# Altium PCB PSC_LED_KEYBOARD.PcbDoc (part 1 of 2)
Units mm, origin at the board's own origin, x right, y up, seen from the top; angles counter-clockwise.
Board outline 100 x 100 mm, 2 copper layers (Top Layer, Bottom Layer); 100 components, 28 nets, 284 pads, 1428 vias.
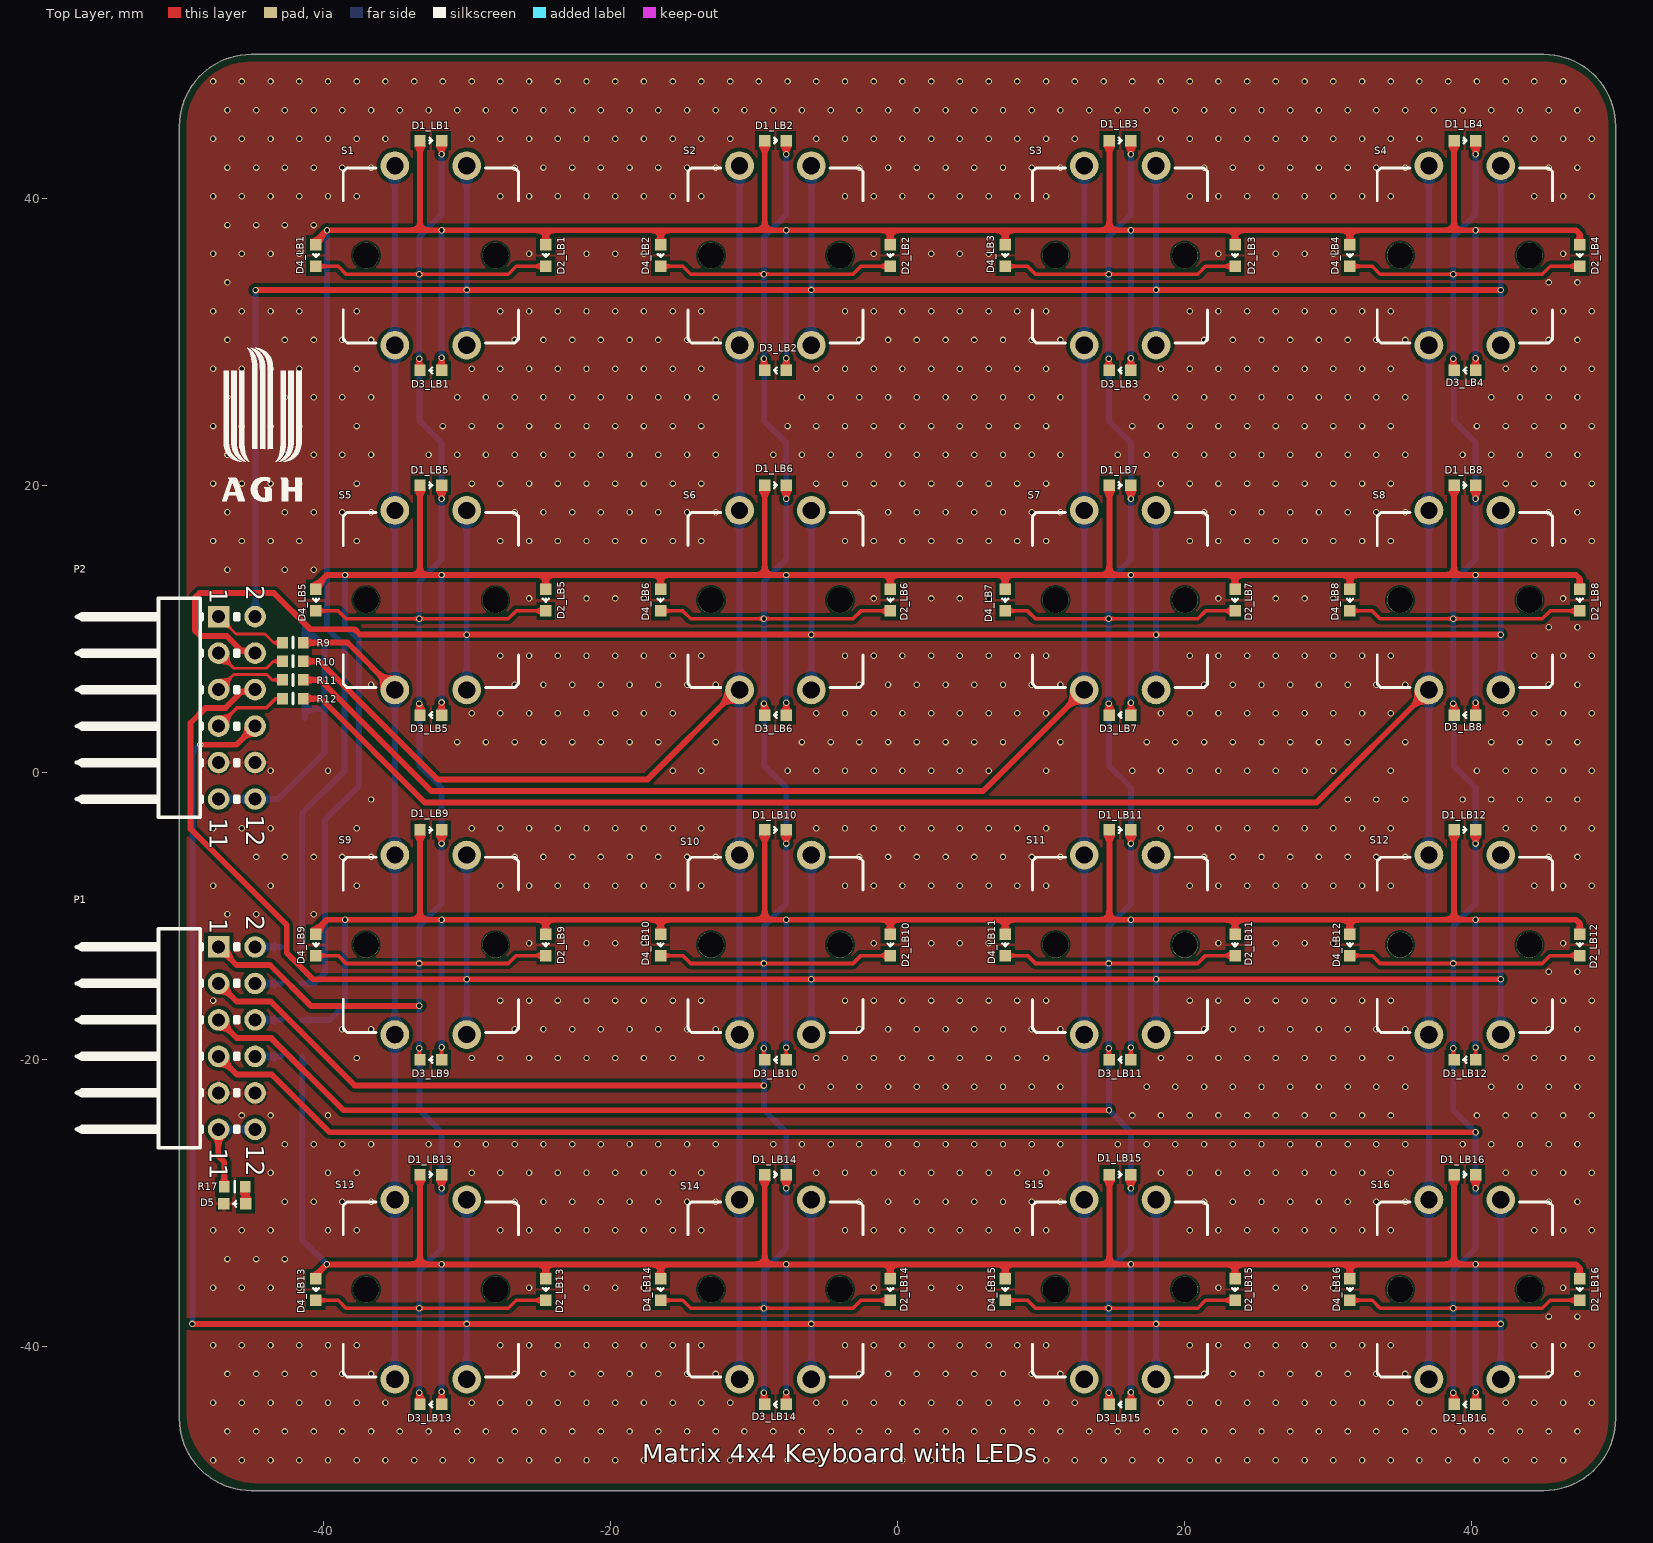
[diagram p0: Top Layer view]
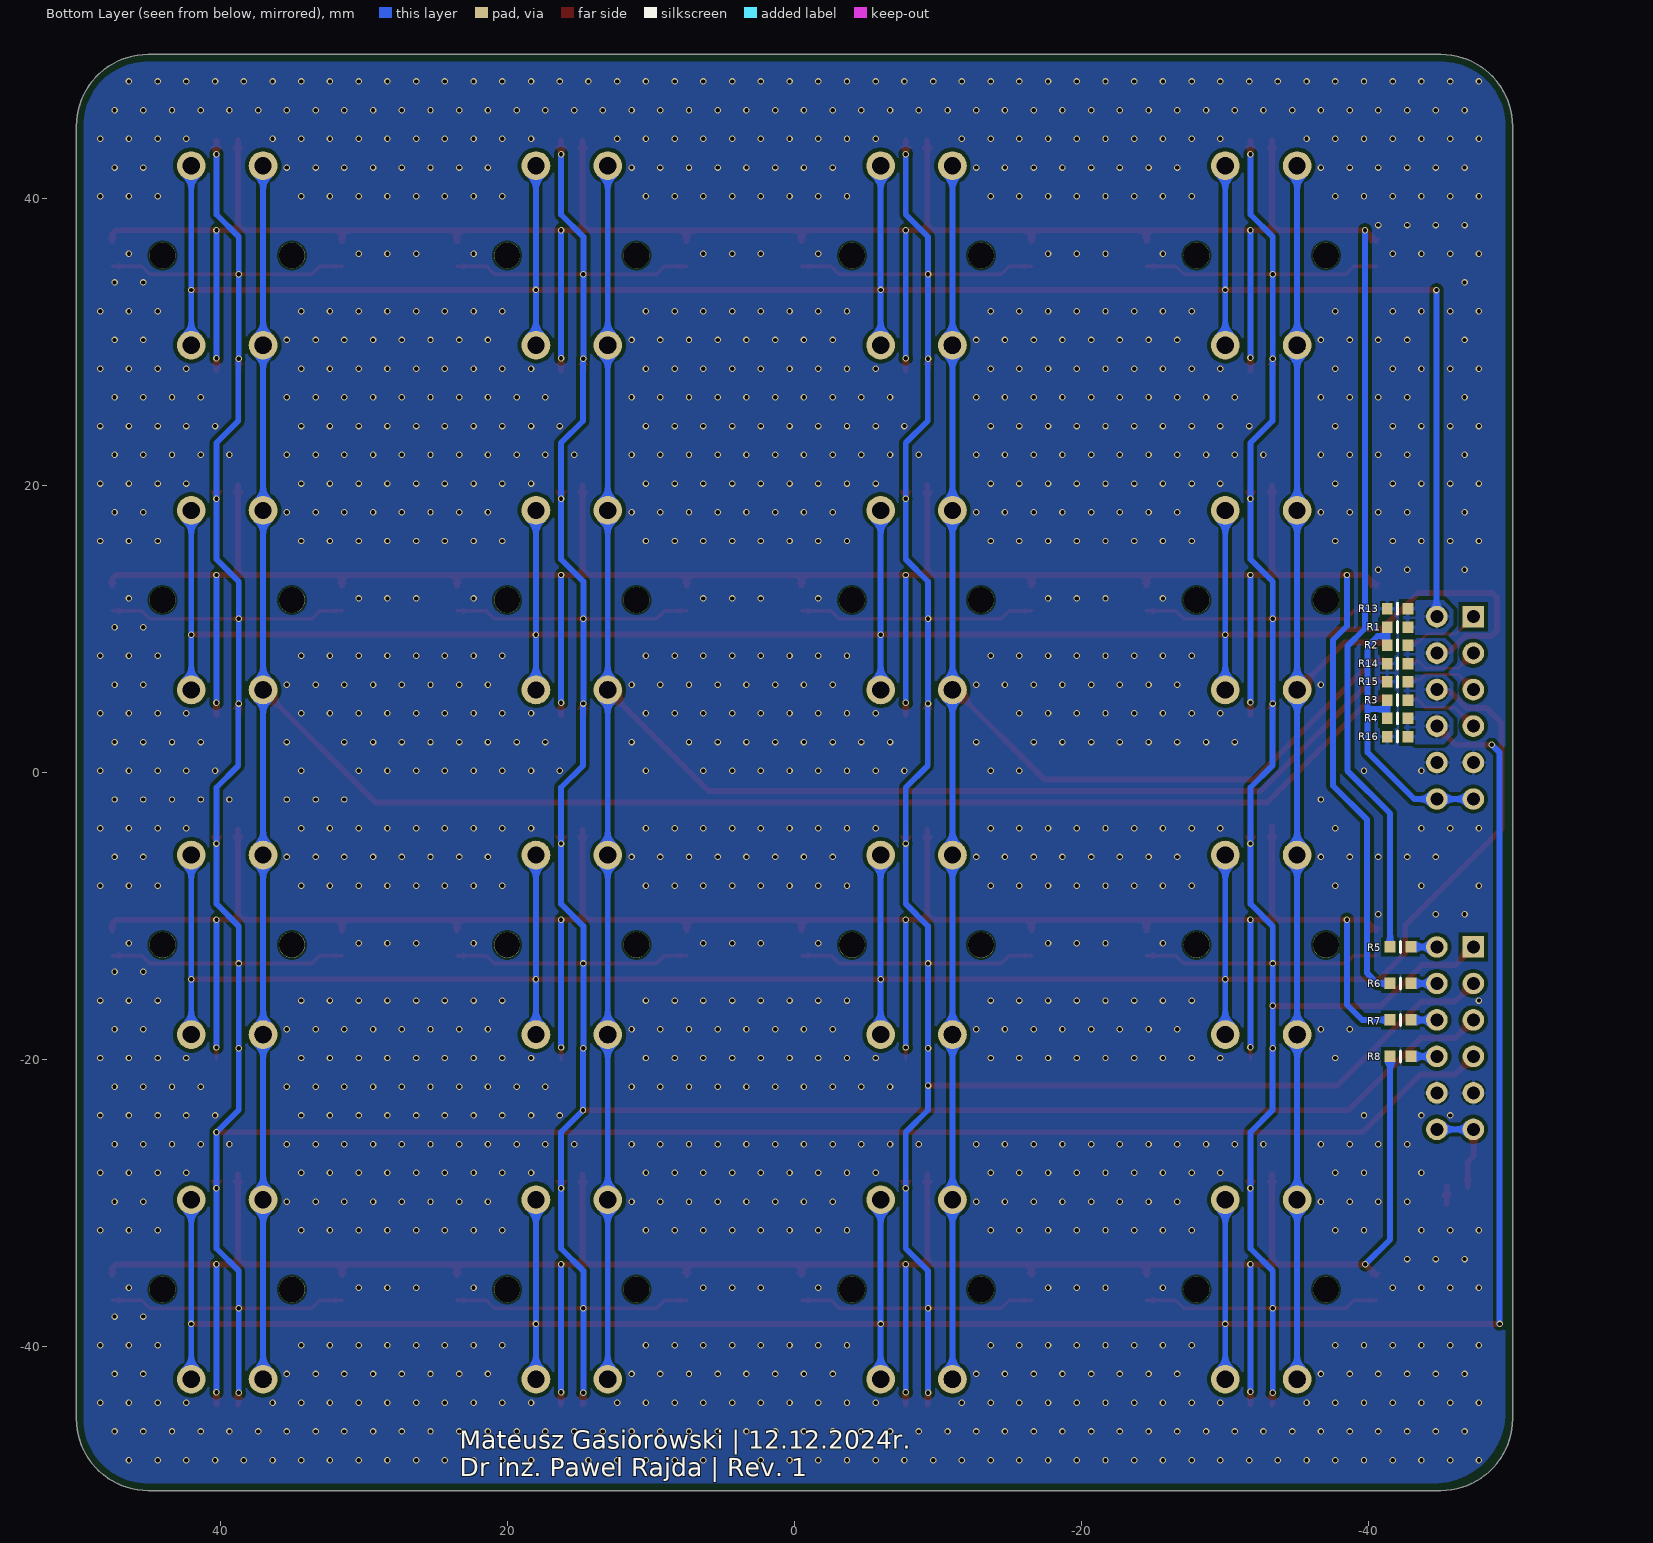
[diagram p1: Bottom Layer view, seen from below]
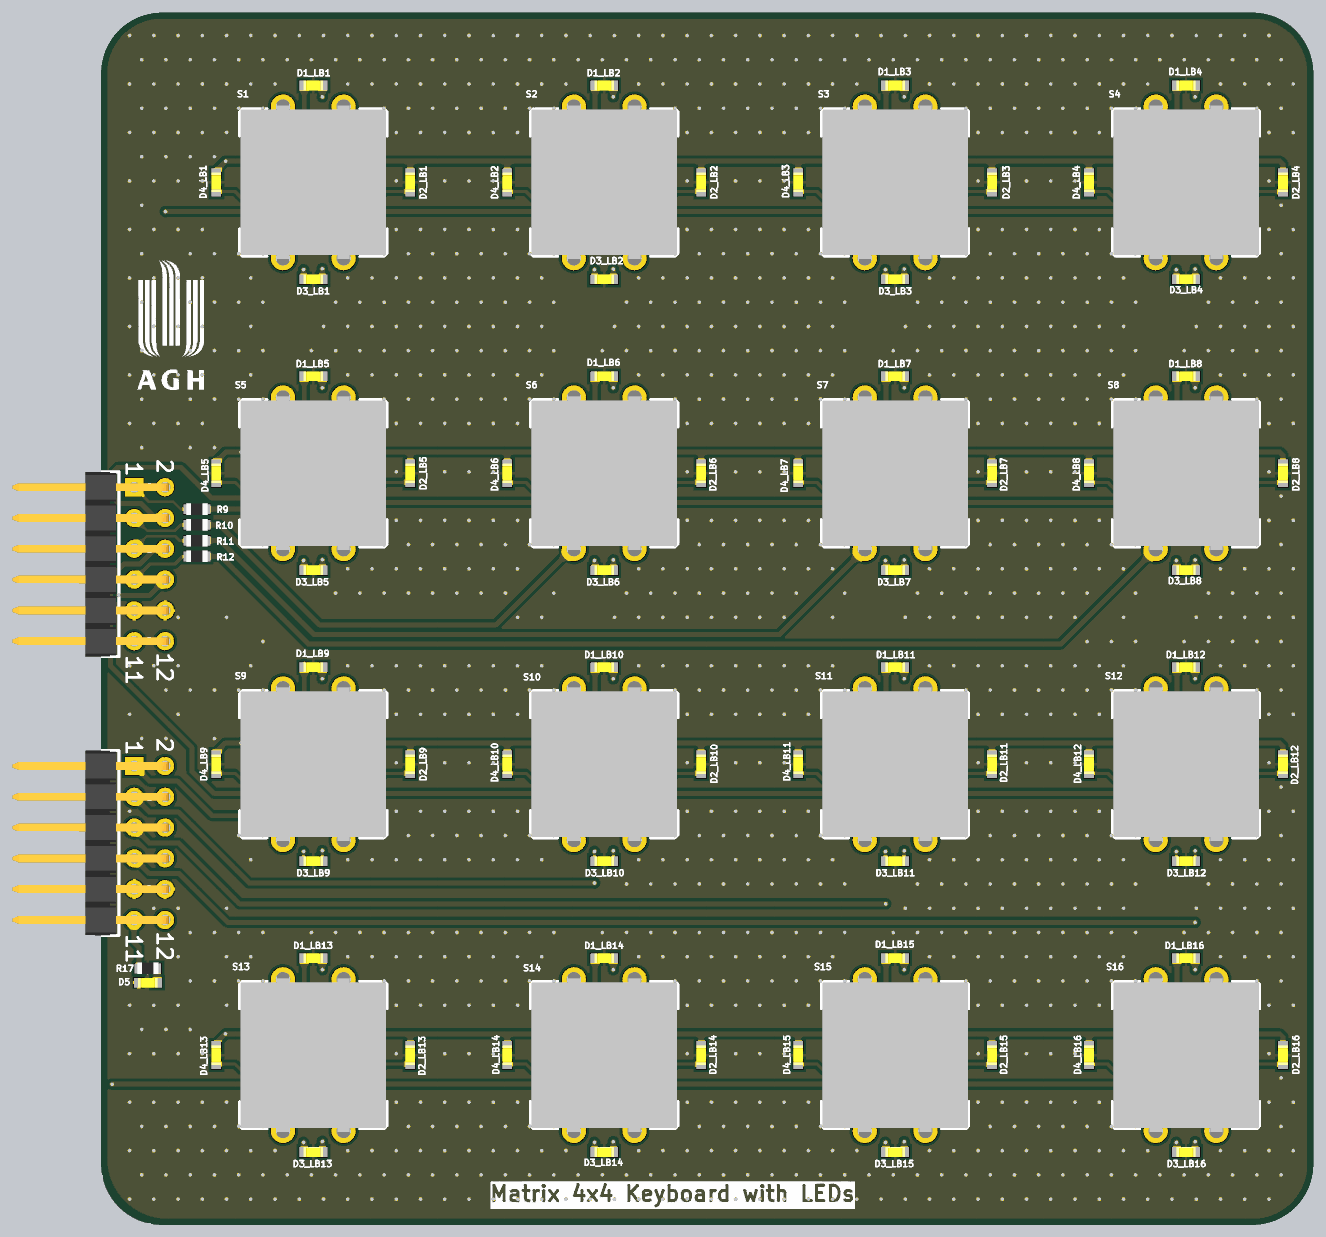
[diagram p3: 3D render of the assembled board from above, using the file's embedded part models]
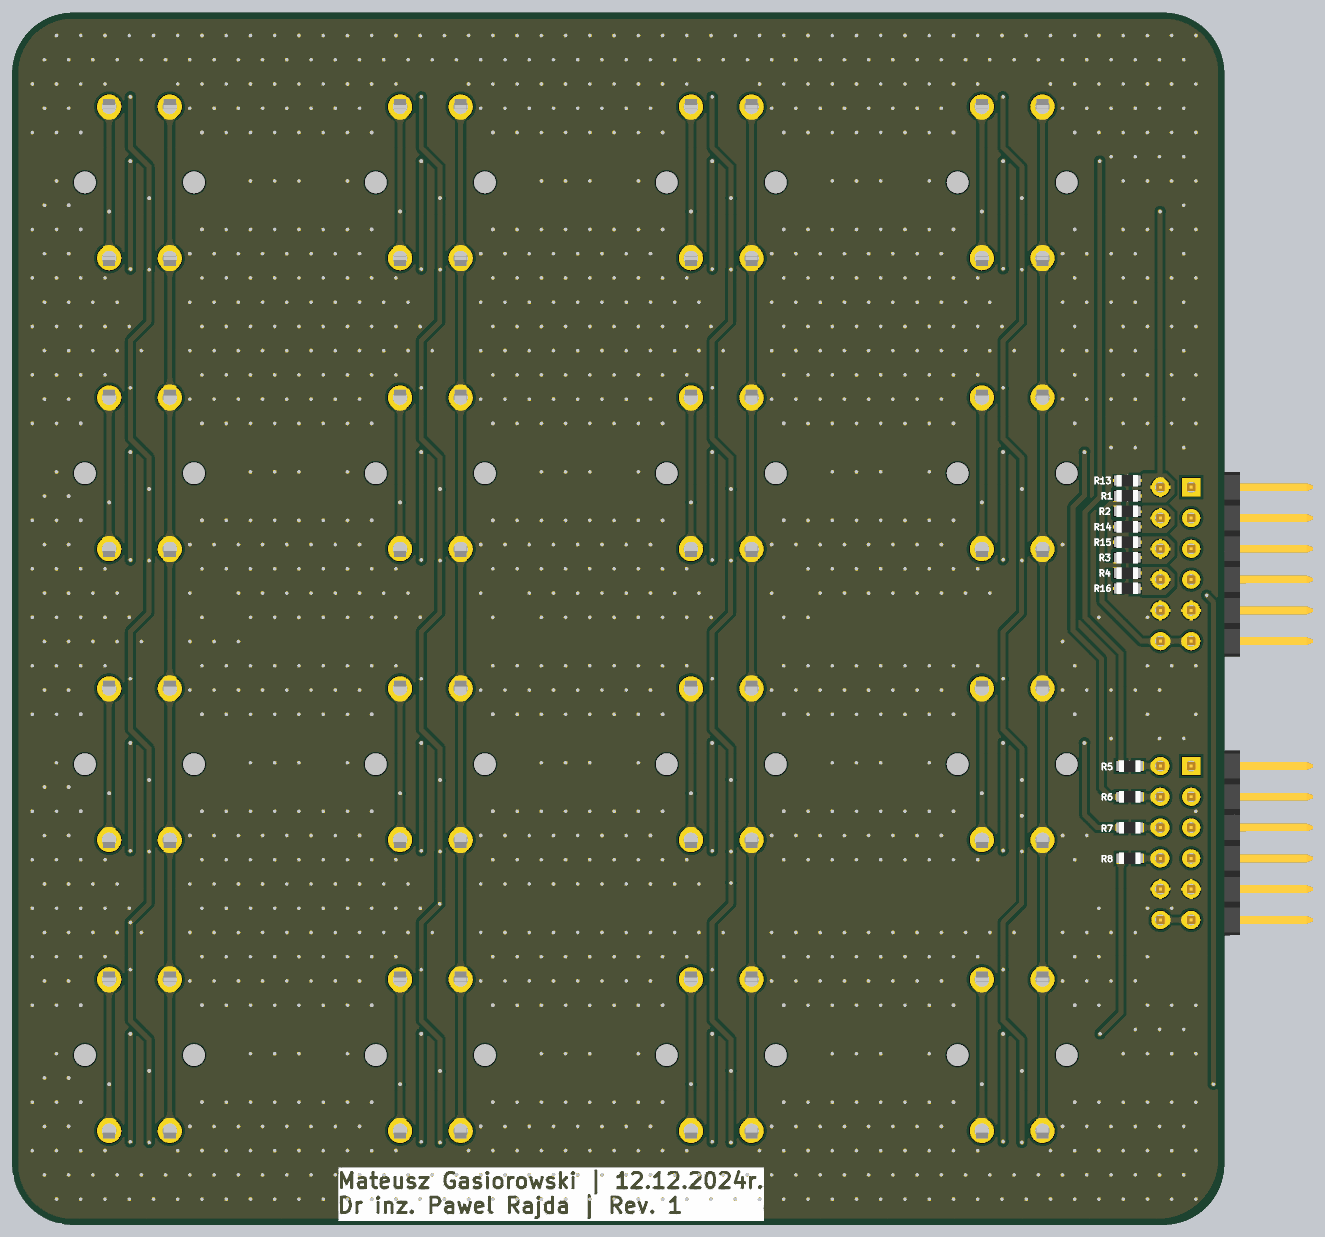
[diagram p4: 3D render of the assembled board from below, using the file's embedded part models]

## Layer stack, top to bottom
Top Solder: solder mask 0.0102, Solder Resist, Dk 3.5
Top Layer: signal copper 0.0356
Dielectric 1: dielectric 0.32, FR-4, Dk 4.8
Bottom Layer: signal copper 0.0356
Bottom Solder: solder mask 0.0102, Solder Resist, Dk 3.5

## Board outline
-50,-45 -50,45 cw(c-45,45) -45,50 45,50 cw(c45,45) 50,45 50,-45 cw(c45,-45) 45,-50 -45,-50 cw(c-45,-45)

## Design rules (kind name [scope] priority, off if disabled: settings)
BoardOutlineClearance [All] p1: gap=0.2 ignorepadtopadclearanceinfootprint=FALSE
Clearance [All] p1: gap=0.127 ignorepadtopadclearanceinfootprint=FALSE except(0.2: Track-SMDPad Track-THPad; 0.254: Arc-Poly Track-Poly Track-Hole SMDPad-Poly THPad-Poly Via-Via Via-Poly Fill-Poly Poly-Poly; 0.54: THPad-THPad)
ComponentClearance [All] p1: gap=0.102 collisioncheckmode=3 verticalgap=0.102 showdistances=TRUE
DiffPairsRouting [All] p1: maxlimit=0.102 minlimit=0.102 mostfreqgap=0.102 toplayer_minwidth=0.102 toplayer_maxwidth=1816.048 toplayer_prefwidth=0.102 bottomlayer_minwidth=0.102 bottomlayer_maxwidth=1816.048 bottomlayer_prefwidth=0.102 maxuncoupledlength=12.7
Height [All] p1: minheight=0 maxheight=1816.048 prefheight=12.7
HoleSize [All] p1: absolutevalues=TRUE maxlimit=6.3 minlimit=0.2 maxpercent=80.000 minpercent=20.000
HoleToHoleClearance [All] p1: gap=0.254 allowstackedmicrovias=FALSE
MinimumAnnularRing MinimumAnnularRing_VIA [IsVia] p1: minimumring=0.075
MinimumAnnularRing [All] p2: minimumring=0.13
MinimumSolderMaskSliver [All] p1: minsoldermaskwidth=0
PlaneClearance [All] p1: clearance=0.305
PlaneConnect [All] p1: pad.planeconnectstyle=Relief pad.reliefexpansion=0.3 pad.reliefentries=4 pad.reliefconductorwidth=0.381 pad.reliefairgap=0.102 via.planeconnectstyle=Direct via.reliefexpansion=0.3 via.reliefentries=4 via.reliefconductorwidth=0.127 via.reliefairgap=0.127
PolygonConnect [All] p1: thpad.connectstyle=Relief thpad.reliefconductorwidth=0.254 thpad.reliefentries=4 thpad.polygonreliefangle="90 Angle" thpad.airgapwidth=0.127 smdpad.connectstyle=Relief smdpad.reliefconductorwidth=0.254 smdpad.reliefentries=4 smdpad.polygonreliefangle="90 Angle" smdpad.airgapwidth=0.127 via.connectstyle=Direct via.reliefconductorwidth=0.254 via.reliefentries=4 via.polygonreliefangle="90 Angle" via.airgapwidth=0.254
RoutingVias [All] p1: holewidth=0.2 width=0.45 viastyle="Through Hole" minholewidth=0.2 minwidth=0.45 maxholewidth=6.3 maxwidth=6.55
SilkToSilkClearance [All] p1: silktosilkclearance=0.025
SilkToSolderMaskClearance [IsPad] p1: minsilkscreentomaskgap=0.051 clearancetoexposedcopper=TRUE
SolderMaskExpansion SolderMaskExpansion_VIA [IsVia] p1: expansion=-0.508 istentingtop=TRUE
SolderMaskExpansion [All] p2: expansion=0.075 istentingtop=FALSE
SupplyNets "Schematic Supply Nets_1" [InNet('GND')] p1: voltage=0.000
SupplyNets "Schematic Supply Nets" [InNet('3V3')] p2: voltage=0.000
UnRoutedNet [All] p1: checkbadconnections=TRUE
UnpouredPolygon UnpouredPolygon_1 [All] p1:
Width [All] p1: maxlimit=5.08 minlimit=0.127 preferedwidth=0.152
18 further rules are at their usual default settings.

## Classes and differential pairs
component class LB16: D1_LB16 D2_LB16 D3_LB16 D4_LB16
component class LB15: D1_LB15 D2_LB15 D3_LB15 D4_LB15
component class LB14: D1_LB14 D2_LB14 D3_LB14 D4_LB14
component class LB13: D1_LB13 D2_LB13 D3_LB13 D4_LB13
component class LB12: D1_LB12 D2_LB12 D3_LB12 D4_LB12
component class LB11: D1_LB11 D2_LB11 D3_LB11 D4_LB11
component class LB10: D1_LB10 D2_LB10 D3_LB10 D4_LB10
component class LB9: D1_LB9 D2_LB9 D3_LB9 D4_LB9
component class LB8: D1_LB8 D2_LB8 D3_LB8 D4_LB8
component class LB7: D1_LB7 D2_LB7 D3_LB7 D4_LB7
component class LB6: D1_LB6 D2_LB6 D3_LB6 D4_LB6
component class LB5: D1_LB5 D2_LB5 D3_LB5 D4_LB5
component class LB4: D1_LB4 D2_LB4 D3_LB4 D4_LB4
component class LB3: D1_LB3 D2_LB3 D3_LB3 D4_LB3
channel class Led_block: LB1 LB2 LB3 LB4 LB5 LB6 LB7 LB8 LB9 LB10 LB11 LB12 LB13 LB14 LB15 LB16
component class PSC_LED_KEYBOARD: D5 P1 P2 R1 R2 R3 R4 R5 R6 R7 R8 R9 R10 R11 R12 R13 R14 R15 R16 R17 S1 S2 S3 S4 S5 S6 S7 S8 S9 S10 S11 S12 S13 S14 S15 S16
component class LB2: D1_LB2 D2_LB2 D3_LB2 D4_LB2
component class LB1: D1_LB1 D2_LB1 D3_LB1 D4_LB1

## Components (designator, comment, footprint, x,y, rotation, side; value= is the part's Value field where it differs from the comment)
D1_LB1 "Red LED 0603" OL_0603_1608 -32.5,44 r180 top value=LTST-C193KRKT-5A (schematic designator D1)
D1_LB2 "Red LED 0603" OL_0603_1608 -8.5,44 r180 top value=LTST-C193KRKT-5A (schematic designator D1)
D1_LB3 "Red LED 0603" OL_0603_1608 15.5,44 r180 top value=LTST-C193KRKT-5A (schematic designator D1)
D1_LB4 "Red LED 0603" OL_0603_1608 39.5,44 r180 top value=LTST-C193KRKT-5A (schematic designator D1)
D1_LB5 "Red LED 0603" OL_0603_1608 -32.5,20 r180 top value=LTST-C193KRKT-5A (schematic designator D1)
D1_LB6 "Red LED 0603" OL_0603_1608 -8.5,20 r180 top value=LTST-C193KRKT-5A (schematic designator D1)
D1_LB7 "Red LED 0603" OL_0603_1608 15.5,20 r180 top value=LTST-C193KRKT-5A (schematic designator D1)
D1_LB8 "Red LED 0603" OL_0603_1608 39.5,20 r180 top value=LTST-C193KRKT-5A (schematic designator D1)
D1_LB9 "Red LED 0603" OL_0603_1608 -32.5,-4 r180 top value=LTST-C193KRKT-5A (schematic designator D1)
D1_LB10 "Red LED 0603" OL_0603_1608 -8.5,-4 r180 top value=LTST-C193KRKT-5A (schematic designator D1)
D1_LB11 "Red LED 0603" OL_0603_1608 15.5,-4 r180 top value=LTST-C193KRKT-5A (schematic designator D1)
D1_LB12 "Red LED 0603" OL_0603_1608 39.5,-4 r180 top value=LTST-C193KRKT-5A (schematic designator D1)
D1_LB13 "Red LED 0603" OL_0603_1608 -32.5,-28 r180 top value=LTST-C193KRKT-5A (schematic designator D1)
D1_LB14 "Red LED 0603" OL_0603_1608 -8.5,-28 r180 top value=LTST-C193KRKT-5A (schematic designator D1)
D1_LB15 "Red LED 0603" OL_0603_1608 15.5,-28 r180 top value=LTST-C193KRKT-5A (schematic designator D1)
D1_LB16 "Red LED 0603" OL_0603_1608 39.5,-28 r180 top value=LTST-C193KRKT-5A (schematic designator D1)
D2_LB1 "Red LED 0603" OL_0603_1608 -24.5,36 r90 top value=LTST-C193KRKT-5A (schematic designator D2)
D2_LB2 "Red LED 0603" OL_0603_1608 -0.5,36 r90 top value=LTST-C193KRKT-5A (schematic designator D2)
D2_LB3 "Red LED 0603" OL_0603_1608 23.5,36 r90 top value=LTST-C193KRKT-5A (schematic designator D2)
D2_LB4 "Red LED 0603" OL_0603_1608 47.5,36 r90 top value=LTST-C193KRKT-5A (schematic designator D2)
D2_LB5 "Red LED 0603" OL_0603_1608 -24.5,12 r90 top value=LTST-C193KRKT-5A (schematic designator D2)
D2_LB6 "Red LED 0603" OL_0603_1608 -0.5,12 r90 top value=LTST-C193KRKT-5A (schematic designator D2)
D2_LB7 "Red LED 0603" OL_0603_1608 23.5,12 r90 top value=LTST-C193KRKT-5A (schematic designator D2)
D2_LB8 "Red LED 0603" OL_0603_1608 47.5,12 r90 top value=LTST-C193KRKT-5A (schematic designator D2)
D2_LB9 "Red LED 0603" OL_0603_1608 -24.5,-12 r90 top value=LTST-C193KRKT-5A (schematic designator D2)
D2_LB10 "Red LED 0603" OL_0603_1608 -0.5,-12 r90 top value=LTST-C193KRKT-5A (schematic designator D2)
D2_LB11 "Red LED 0603" OL_0603_1608 23.5,-12 r90 top value=LTST-C193KRKT-5A (schematic designator D2)
D2_LB12 "Red LED 0603" OL_0603_1608 47.5,-12 r90 top value=LTST-C193KRKT-5A (schematic designator D2)
D2_LB13 "Red LED 0603" OL_0603_1608 -24.5,-36 r90 top value=LTST-C193KRKT-5A (schematic designator D2)
D2_LB14 "Red LED 0603" OL_0603_1608 -0.5,-36 r90 top value=LTST-C193KRKT-5A (schematic designator D2)
D2_LB15 "Red LED 0603" OL_0603_1608 23.5,-36 r90 top value=LTST-C193KRKT-5A (schematic designator D2)
D2_LB16 "Red LED 0603" OL_0603_1608 47.5,-36 r90 top value=LTST-C193KRKT-5A (schematic designator D2)
D3_LB1 "Red LED 0603" OL_0603_1608 -32.5,28 r0 top value=LTST-C193KRKT-5A (schematic designator D3)
D3_LB2 "Red LED 0603" OL_0603_1608 -8.5,28 r0 top value=LTST-C193KRKT-5A (schematic designator D3)
D3_LB3 "Red LED 0603" OL_0603_1608 15.5,28 r0 top value=LTST-C193KRKT-5A (schematic designator D3)
D3_LB4 "Red LED 0603" OL_0603_1608 39.5,28 r0 top value=LTST-C193KRKT-5A (schematic designator D3)
D3_LB5 "Red LED 0603" OL_0603_1608 -32.5,4 r0 top value=LTST-C193KRKT-5A (schematic designator D3)
D3_LB6 "Red LED 0603" OL_0603_1608 -8.5,4 r0 top value=LTST-C193KRKT-5A (schematic designator D3)
D3_LB7 "Red LED 0603" OL_0603_1608 15.5,4 r0 top value=LTST-C193KRKT-5A (schematic designator D3)
D3_LB8 "Red LED 0603" OL_0603_1608 39.5,4 r0 top value=LTST-C193KRKT-5A (schematic designator D3)
D3_LB9 "Red LED 0603" OL_0603_1608 -32.5,-20 r0 top value=LTST-C193KRKT-5A (schematic designator D3)
D3_LB10 "Red LED 0603" OL_0603_1608 -8.5,-20 r0 top value=LTST-C193KRKT-5A (schematic designator D3)
D3_LB11 "Red LED 0603" OL_0603_1608 15.5,-20 r0 top value=LTST-C193KRKT-5A (schematic designator D3)
D3_LB12 "Red LED 0603" OL_0603_1608 39.5,-20 r0 top value=LTST-C193KRKT-5A (schematic designator D3)
D3_LB13 "Red LED 0603" OL_0603_1608 -32.5,-44 r0 top value=LTST-C193KRKT-5A (schematic designator D3)
D3_LB14 "Red LED 0603" OL_0603_1608 -8.5,-44 r0 top value=LTST-C193KRKT-5A (schematic designator D3)
D3_LB15 "Red LED 0603" OL_0603_1608 15.5,-44 r0 top value=LTST-C193KRKT-5A (schematic designator D3)
D3_LB16 "Red LED 0603" OL_0603_1608 39.5,-44 r0 top value=LTST-C193KRKT-5A (schematic designator D3)
D4_LB1 "Red LED 0603" OL_0603_1608 -40.5,36 r90 top value=LTST-C193KRKT-5A (schematic designator D4)
D4_LB2 "Red LED 0603" OL_0603_1608 -16.5,36 r90 top value=LTST-C193KRKT-5A (schematic designator D4)
D4_LB3 "Red LED 0603" OL_0603_1608 7.5,36 r90 top value=LTST-C193KRKT-5A (schematic designator D4)
D4_LB4 "Red LED 0603" OL_0603_1608 31.5,36 r90 top value=LTST-C193KRKT-5A (schematic designator D4)
D4_LB5 "Red LED 0603" OL_0603_1608 -40.5,12 r90 top value=LTST-C193KRKT-5A (schematic designator D4)
D4_LB6 "Red LED 0603" OL_0603_1608 -16.5,12 r90 top value=LTST-C193KRKT-5A (schematic designator D4)
D4_LB7 "Red LED 0603" OL_0603_1608 7.5,12 r90 top value=LTST-C193KRKT-5A (schematic designator D4)
D4_LB8 "Red LED 0603" OL_0603_1608 31.5,12 r90 top value=LTST-C193KRKT-5A (schematic designator D4)
D4_LB9 "Red LED 0603" OL_0603_1608 -40.5,-12 r90 top value=LTST-C193KRKT-5A (schematic designator D4)
D4_LB10 "Red LED 0603" OL_0603_1608 -16.5,-12 r90 top value=LTST-C193KRKT-5A (schematic designator D4)
D4_LB11 "Red LED 0603" OL_0603_1608 7.5,-12 r90 top value=LTST-C193KRKT-5A (schematic designator D4)
D4_LB12 "Red LED 0603" OL_0603_1608 31.5,-12 r90 top value=LTST-C193KRKT-5A (schematic designator D4)
D4_LB13 "Red LED 0603" OL_0603_1608 -40.5,-36 r90 top value=LTST-C193KRKT-5A (schematic designator D4)
D4_LB14 "Red LED 0603" OL_0603_1608 -16.5,-36 r90 top value=LTST-C193KRKT-5A (schematic designator D4)
D4_LB15 "Red LED 0603" OL_0603_1608 7.5,-36 r90 top value=LTST-C193KRKT-5A (schematic designator D4)
D4_LB16 "Red LED 0603" OL_0603_1608 31.5,-36 r90 top value=LTST-C193KRKT-5A (schematic designator D4)
D5 "Red LED 0603" OL_0603_1608 -46.15,-30.025 r0 top value=LTST-C193KRKT-5A
P1 "Goldpin male" P_HEADER_2x6_2.54_RIGHT_ANGLE -46,-18.5 r270 top value=90122-0766
P2 "Goldpin male" P_HEADER_2x6_2.54_RIGHT_ANGLE -46,4.5 r270 top value=90122-0766
R1 "Resistor" R_0603_1608 -42,10.129 r0 bottom value=10k
R2 "Resistor" R_0603_1608 -42,8.857 r0 bottom value=10k
R3 "Resistor" R_0603_1608 -42,5.043 r0 bottom value=10k
R4 "Resistor" R_0603_1608 -42,3.771 r0 bottom value=10k
R5 "Resistor" R_0603_1608 -42.2,-12.15 r0 bottom value=10k
R6 "Resistor" R_0603_1608 -42.2,-14.69 r0 bottom value=10k
R7 "Resistor" R_0603_1608 -42.2,-17.23 r0 bottom value=10k
R8 "Resistor" R_0603_1608 -42.2,-19.77 r0 bottom value=10k
R9 "Resistor" R_0603_1608 -42.1,9.043 r0 top value=10k
R10 "Resistor" R_0603_1608 -42.1,7.743 r0 top value=10k
R11 "Resistor" R_0603_1608 -42.1,6.443 r0 top value=10k
R12 "Resistor" R_0603_1608 -42.1,5.143 r0 top value=10k
R13 "Resistor" R_0603_1608 -42,11.4 r180 bottom value=10k
R14 "Resistor" R_0603_1608 -42,7.586 r180 bottom value=10k
R15 "Resistor" R_0603_1608 -42,6.314 r180 bottom value=10k
R16 "Resistor" R_0603_1608 -42,2.5 r180 bottom value=10k
R17 "Resistor" R_0603_1608 -46.15,-28.85 r180 top value=10k
S1 "S_TACTSWITCH" S_TactSwitch_12x12 -32.5,36 r90 top
S2 "S_TACTSWITCH" S_TactSwitch_12x12 -8.5,36 r90 top
S3 "S_TACTSWITCH" S_TactSwitch_12x12 15.5,36 r90 top
S4 "S_TACTSWITCH" S_TactSwitch_12x12 39.5,36 r90 top
S5 "S_TACTSWITCH" S_TactSwitch_12x12 -32.5,12 r90 top
S6 "S_TACTSWITCH" S_TactSwitch_12x12 -8.5,12 r90 top
S7 "S_TACTSWITCH" S_TactSwitch_12x12 15.5,12 r90 top
S8 "S_TACTSWITCH" S_TactSwitch_12x12 39.5,12 r90 top
S9 "S_TACTSWITCH" S_TactSwitch_12x12 -32.5,-12 r90 top
S10 "S_TACTSWITCH" S_TactSwitch_12x12 -8.5,-12 r90 top
S11 "S_TACTSWITCH" S_TactSwitch_12x12 15.5,-12 r90 top
S12 "S_TACTSWITCH" S_TactSwitch_12x12 39.5,-12 r90 top
S13 "S_TACTSWITCH" S_TactSwitch_12x12 -32.5,-36 r90 top
S14 "S_TACTSWITCH" S_TactSwitch_12x12 -8.5,-36 r90 top
S15 "S_TACTSWITCH" S_TactSwitch_12x12 15.5,-36 r90 top
S16 "S_TACTSWITCH" S_TactSwitch_12x12 39.5,-36 r90 top

## Footprints (in the part's own frame and the unit in brackets; to place one, negate y for a bottom-side part, rotate by r counter-clockwise, add the part's x,y. Pads: shape width x height; smd on the part's side, far side on the other; paste and mask are expansions set on the pad)
OL_0603_1608 [mm]
  rect 0.8x0.8 smd: 1(-0.75,0) 2(0.75,0)
  silkscreen extent -0.11,-0.21 0.1,0.21, body extent -0.8,-0.4 0.8,0.4, height 0.75
P_HEADER_2x6_2.54_RIGHT_ANGLE [mm] "Connector; Header"
  rect 1.5x1.5 hole 0.9: 1(-6.35,-1.27)
  round 1.5 hole 0.9: 2(-6.35,1.27) 3(-3.81,-1.27) 4(-3.81,1.27) 5(-1.27,-1.27) 6(-1.27,1.27) 7(1.27,-1.27) 8(1.27,1.27) 9(3.81,-1.27) 10(3.81,1.27) 11(6.35,-1.27) 12(6.35,1.27)
  silkscreen extent -7.62,-11.18 7.62,0.13, body extent -7.62,-11.3 7.62,1.6, height 5.1
R_0603_1608 [mm]
  rect 0.75x0.8 smd: 1(-0.725,0) 2(0.725,0)
  silkscreen extent 0,-0.38 0,0.38, body extent -0.87,-0.47 0.88,0.48, height 0.54
S_TactSwitch_12x12 [mm] "B3F-4050"
  round 2 hole 1.2: 1(-6.25,-2.5) 1(6.25,-2.5) 2(-6.25,2.5) 2(6.25,2.5)
  round 1.8 hole 1.8 unplated: DNC(0,4.5) DNC(0,-4.5)
  silkscreen extent -6.1,-6.1 6.1,6.1, body extent -6.9,-6 6.9,6, height 3

## Part data
D1_LB1 D1_LB2 D1_LB3 D1_LB4 D1_LB5 D1_LB6 D1_LB7 D1_LB8 D1_LB9 D1_LB10 D1_LB11 D1_LB12 D1_LB13 D1_LB14 D1_LB15 D1_LB16 D2_LB1 D2_LB2 D2_LB3 D2_LB4 D2_LB5 D2_LB6 D2_LB7 D2_LB8 D2_LB9 D2_LB10 D2_LB11 D2_LB12 D2_LB13 D2_LB14 D2_LB15 D2_LB16 D3_LB1 D3_LB2 D3_LB3 D3_LB4 D3_LB5 D3_LB6 D3_LB7 D3_LB8 D3_LB9 D3_LB10 D3_LB11 D3_LB12 D3_LB13 D3_LB14 D3_LB15 D3_LB16 D4_LB1 D4_LB2 D4_LB3 D4_LB4 D4_LB5 D4_LB6 D4_LB7 D4_LB8 D4_LB9 D4_LB10 D4_LB11 D4_LB12 D4_LB13 D4_LB14 D4_LB15 D4_LB16 D5: library part OL_R_0603_LTST-C193KRKT-5A, "LED_RED", Manufacturer=Lite-On, Manufacturer Part Number=LTST-C193KRKT-5A, HelpURL=https://pl.mouser.com/datasheet/2/239/LTST-C193KRKT-5A-1141706.pdf, Part Number=OL_R_0603_LTST-C193KRKT-5A, SCH_Footprint=0603, Supplier 1=TME, Supplier 2="RS Components", Supplier 3=Farnell, Supplier 4=Mouser, Supplier 5=Digi-Key, Supplier 6=LCSC, Supplier Part Number 1=LTST-C193KRKT-5A, Supplier Part Number 2=6921041, Supplier Part Number 4=859-LTSTC193KRKT5A, Supplier Part Number 5=160-1830-1-ND
P1 P2: library part P_HEADER_2x6_2.54_ANGLE, "Pin Header", Manufacturer=Molex, Manufacturer Part Number=90122-0766, HelpURL=https://datasheet.octopart.com/90122-0766-Molex-datasheet-101610747.pdf, Part Number=P_HEADER_2x6_2.54_ANGLE, SCH_Footprint="2x6 2.54mm", Supplier 1=TME, Supplier 2="RS Components", Supplier 3=Farnell, Supplier 4=Mouser, Supplier 5=Digi-Key, Supplier 6=LCSC, Supplier Part Number 2=3606572, Supplier Part Number 3=9733710, Supplier Part Number 4=538-90122-0766, Supplier Part Number 5=WM50030-12-ND
R1 R2 R3 R4 R5 R6 R7 R8 R9 R10 R11 R12 R13 R14 R15 R16 R17: library part R_10k_0603_0.1, Manufacturer=Panasonic, Manufacturer Part Number=ERA3ARB103V, Power=100mW, Tolerance=0.1%, Voltage=75V, HelpURL=https://www.mouser.pl/datasheet/2/315/AOA0000C307-1149632.pdf, Part Number=R_10k_0603_0.1, SCH_Footprint=0603, Supplier 1=TME, Supplier 2="RS Components", Supplier 3=Farnell, Supplier 4=Mouser, Supplier 5=Digi-Key, Supplier 6=LCSC, Supplier Part Number 1=ERA3ARB103V, Supplier Part Number 2=1829211, Supplier Part Number 3=1717597, Supplier Part Number 4=667-ERA-3ARB103V, Supplier Part Number 5=P10KBDCT-ND
S1 S2 S3 S4 S5 S6 S7 S8 S9 S10 S11 S12 S13 S14 S15 S16: "Tact switch"

## Via types
v1: diameter 0.45, hole 0.3, Top Layer to Bottom Layer, tented both sides, 1428 vias

## Nets (pads, with @x,y where several pads share a name; then routed paths per layer and width w, separated by ;. In a path a pad name is that pad's centre, name@x,y a point inside that pad or via, vN(x,y) a via of type N, cw(c..) or ccw(c..) an arc to the next point about the centre after c; other vN are vias at no path point)
3V3: P2.11 P2.12 R1.2 R2.2 R3.2 R4.2 | length 21.7
  Bottom Layer w0.406: P2.11@-47.27,-1.85 P2.12@-44.73,-1.85 -43.15,-1.85 -39.9,1.4 -39.9,4.4 ; R4.2@-41.275,3.771 -41.275,4.411 ; R3.2@-41.275,5.043 -41.275,4.411 ; R2.2@-41.275,8.857 -41.275,9.503 ; R1.2@-41.275,10.129 -41.275,9.503 ; -41.275,4.411 -39.911,4.411 -39.9,4.4 ; -41.275,9.503 -40.603,9.503 -40.4,9.3 -39.9,8.8 -39.9,4.4
C17: P1.2 R5.1 | length 1.8
  Bottom Layer w0.406: P1.2@-44.73,-12.15 R5.1@-42.925,-12.15
D14: P2.2 R1.1 R13.2 S1.1 S2.1 S3.1 S4.1 | length 159.3
  Top Layer w0.406: v1@-44.601,33.6 v1(-30,33.6) v1(-6,33.6) v1(18,33.6) ; v1@18.003,33.597 v1@41.997,33.597
  Bottom Layer w0.406: P2.2@-44.73,10.85 -44.701,10.879 v1(-44.701,33.588) ; S1.1@-30,29.75 S1.1@-30,42.25 ; S2.1@-6,29.75 S2.1@-6,42.25 ; S3.1@18,29.75 S3.1@18,42.25 ; S4.1@42,29.75 v1(42,33.594) S4.1@42,42.25
D17: D1_LB1.1 D1_LB5.1 D1_LB9.1 D1_LB13.1 D2_LB1.1 D2_LB5.1 D2_LB9.1 D2_LB13.1 D3_LB1.1 D3_LB5.1 D3_LB9.1 D3_LB13.1 D4_LB1.1 D4_LB5.1 D4_LB9.1 D4_LB13.1 P1.1 | length 179.2
  Top Layer w0.203: v1(-33.3,-19.2) -33.3,-19.95 D3_LB9.1@-33.25,-20
  Top Layer w0.254: D4_LB13.1@-40.5,-36.75 -38.95,-36.75 -38.4,-37.3 -27.1,-37.3 -26.55,-36.75 D2_LB13.1@-24.5,-36.75 ; D4_LB9.1@-40.5,-12.75 -38.95,-12.75 -38.4,-13.3 -27.1,-13.3 -26.55,-12.75 D2_LB9.1@-24.5,-12.75 ; D4_LB5.1@-40.5,11.25 -38.95,11.25 -38.4,10.7 -27.1,10.7 -26.55,11.25 D2_LB5.1@-24.5,11.25 ; D4_LB1.1@-40.5,35.25 -38.95,35.25 -38.4,34.7 -27.1,34.7 -26.55,35.25 D2_LB1.1@-24.5,35.25
  Top Layer w0.406: P1.1@-47.27,-12.15 -46.02,-13.4 -43.7,-13.4 -40.85,-16.25 v1(-33.3,-16.25) ; v1(-33.3,-43.2) -33.3,-43.95 D3_LB13.1@-33.25,-44 ; v1(-33.3,4.8) -33.3,4.05 D3_LB5.1@-33.25,4 ; v1(-33.3,28.8) -33.3,28.05 D3_LB1.1@-33.25,28 ; v1(-31.75,-28.95) D1_LB13.1@-31.75,-28 ; v1(-31.75,-4.95) D1_LB9.1@-31.75,-4 ; v1(-31.75,19.05) D1_LB5.1@-31.75,20 ; v1(-31.75,43.05) D1_LB1.1@-31.75,44
  Bottom Layer w0.406: v1(-33.3,-43.2) -33.3,-34.7 -31.75,-33.15 v1(-31.75,-28.95) -31.75,-25.05 -33.275,-23.525 -33.275,-19.225 v1(-33.3,-19.2) v1(-33.3,-16.25) v1(-33.3,-13.3) -33.3,-10.7 -31.75,-9.15 v1(-31.75,-4.95) -31.75,-1.05 -33.275,0.475 v1@-33.275,4.775 ; v1(-33.3,4.8) -33.3,13.3 -31.75,14.85 v1(-31.75,19.05) -31.75,22.95 -33.275,24.475 v1@-33.275,28.775 ; v1(-33.3,28.8) -33.3,37.3 -31.75,38.85 v1(-31.75,43.05)
  other v1: -33.3,-37.3 -33.3,10.7 -33.3,34.7
D18: P1.4 R6.1 | length 1.8
  Bottom Layer w0.406: P1.4@-44.73,-14.69 R6.1@-42.925,-14.69
E16: P2.1 R9.1 | length 5.2
  Top Layer w0.203: P2.1@-47.27,10.85 -46.071,9.651 -44.051,9.651 -43.443,9.043 R9.1@-42.825,9.043
E17: D1_LB2.1 D1_LB6.1 D1_LB10.1 D1_LB14.1 D2_LB2.1 D2_LB6.1 D2_LB10.1 D2_LB14.1 D3_LB2.1 D3_LB6.1 D3_LB10.1 D3_LB14.1 D4_LB2.1 D4_LB6.1 D4_LB10.1 D4_LB14.1 P1.3 | length 204.5
  Top Layer w0.203: v1(-9.3,-19.2) -9.3,-19.95 D3_LB10.1@-9.25,-20
  Top Layer w0.254: D4_LB14.1@-16.5,-36.75 -14.95,-36.75 -14.4,-37.3 -3.1,-37.3 -2.55,-36.75 D2_LB14.1@-0.5,-36.75 ; D4_LB10.1@-16.5,-12.75 -14.95,-12.75 -14.4,-13.3 -3.1,-13.3 -2.55,-12.75 D2_LB10.1@-0.5,-12.75 ; D4_LB6.1@-16.5,11.25 -14.95,11.25 -14.4,10.7 -3.1,10.7 -2.55,11.25 D2_LB6.1@-0.5,11.25 ; D4_LB2.1@-16.5,35.25 -14.95,35.25 -14.4,34.7 -3.1,34.7 -2.55,35.25 D2_LB2.1@-0.5,35.25
  Top Layer w0.406: P1.3@-47.27,-14.69 -46.01,-15.95 -43.65,-15.95 -37.8,-21.8 v1(-9.3,-21.8) ; v1(-9.3,-43.2) -9.3,-43.95 D3_LB14.1@-9.25,-44 ; v1(-9.3,4.8) -9.3,4.05 D3_LB6.1@-9.25,4 ; v1(-9.3,28.8) -9.3,28.05 D3_LB2.1@-9.25,28 ; v1(-7.75,-28.95) D1_LB14.1@-7.75,-28 ; v1(-7.75,-4.95) D1_LB10.1@-7.75,-4 ; v1(-7.75,19.05) D1_LB6.1@-7.75,20 ; v1(-7.75,43.05) D1_LB2.1@-7.75,44
  Bottom Layer w0.406: v1(-9.3,-43.2) -9.3,-34.7 -7.75,-33.15 v1(-7.75,-28.95) -7.75,-25.05 -9.3,-23.5 v1(-9.3,-13.3) -9.3,-10.7 -7.75,-9.15 v1(-7.75,-4.95) -7.75,-1.05 -9.275,0.475 v1@-9.275,4.775 ; v1(-9.3,4.8) -9.3,13.3 -7.75,14.85 v1(-7.75,19.05) -7.75,22.95 -9.275,24.475 v1@-9.275,28.775 ; v1(-9.3,28.8) -9.3,37.3 -7.75,38.85 v1(-7.75,43.05)
  other v1: -9.3,-37.3 -9.3,10.7 -9.3,34.7
E18: P1.6 R7.1 | length 1.8
  Bottom Layer w0.406: P1.6@-44.73,-17.23 R7.1@-42.925,-17.23
F13: P2.3 R10.1 | length 5.1
  Top Layer w0.203: P2.3@-47.27,8.31 -46.215,7.255 -43.945,7.255 -43.457,7.743 R10.1@-42.825,7.743
F16: P2.4 R2.1 R14.2 S5.1 S6.1 S7.1 S8.1 | length 149.4
  Top Layer w0.406: P2.4@-44.73,8.31 -44.889,8.469 -45.681,8.469 -46.711,9.5 -48.525,9.5 -48.925,9.9 -48.925,12.175 -48.6,12.5 -43.425,12.5 -40.9,9.975 -37.8,9.975 -37.425,9.6 v1(-30,9.6) v1(-6,9.6) v1(18,9.6) v1(42,9.6)
  Bottom Layer w0.406: S5.1@-30,5.75 v1(-30,9.6) S5.1@-30,18.25 ; S6.1@-6,5.75 S6.1@-6,18.25 ; S7.1@18,5.75 S7.1@18,18.25 ; S8.1@42,5.75 S8.1@42,18.25
F18: D1_LB3.1 D1_LB7.1 D1_LB11.1 D1_LB15.1 D2_LB3.1 D2_LB7.1 D2_LB11.1 D2_LB15.1 D3_LB3.1 D3_LB7.1 D3_LB11.1 D3_LB15.1 D4_LB3.1 D4_LB7.1 D4_LB11.1 D4_LB15.1 P1.5 | length 228.2
  Top Layer w0.203: D3_LB11.1@14.7,-19.95 D3_LB11.1@14.75,-20
  Top Layer w0.254: D4_LB15.1@7.5,-36.75 9.05,-36.75 9.6,-37.3 v1(14.7,-37.3) 20.9,-37.3 21.45,-36.75 D2_LB15.1@23.5,-36.75 ; D4_LB11.1@7.5,-12.75 9.05,-12.75 9.6,-13.3 v1(14.7,-13.3) 20.9,-13.3 21.45,-12.75 D2_LB11.1@23.5,-12.75 ; D4_LB7.1@7.5,11.25 9.05,11.25 9.6,10.7 v1(14.7,10.7) 20.9,10.7 21.45,11.25 D2_LB7.1@23.5,11.25 ; D4_LB3.1@7.5,35.25 9.05,35.25 9.6,34.7 v1(14.7,34.7) 20.9,34.7 21.45,35.25 D2_LB3.1@23.5,35.25 ; D3_LB11.1@14.7,-19.95 v1(14.7,-19.2)
  Top Layer w0.406: P1.5@-47.27,-17.23 -46,-18.5 -43.6,-18.5 -38.575,-23.525 v1(14.725,-23.525) ; v1(14.7,-43.2) 14.7,-43.95 D3_LB15.1@14.75,-44 ; v1(14.7,4.8) 14.7,4.05 D3_LB7.1@14.75,4 ; v1(14.7,28.8) 14.7,28.05 D3_LB3.1@14.75,28 ; v1(16.25,-28.95) D1_LB15.1@16.25,-28 ; v1(16.25,-4.95) D1_LB11.1@16.25,-4 ; v1(16.25,19.05) D1_LB7.1@16.25,20 ; v1(16.25,43.05) D1_LB3.1@16.25,44
  Bottom Layer w0.406: v1(14.7,-43.2) v1(14.7,-37.3) 14.7,-34.7 16.25,-33.15 v1(16.25,-28.95) 16.25,-25.05 v1(14.725,-23.525) 14.725,-19.225 v1(14.7,-19.2) v1(14.7,-13.3) 14.7,-10.7 16.25,-9.15 v1(16.25,-4.95) 16.25,-1.05 14.725,0.475 v1@14.725,4.775 ; v1(14.7,4.8) v1(14.7,10.7) 14.7,13.3 16.25,14.85 v1(16.25,19.05) 16.25,22.95 14.725,24.475 v1@14.725,28.775 ; v1(14.7,28.8) v1(14.7,34.7) 14.7,37.3 16.25,38.85 v1(16.25,43.05)
G13: P2.5 R11.1 | length 5
  Top Layer w0.203: P2.5@-47.263,5.777 -46.215,6.825 -43.925,6.825 -43.543,6.443 R11.1@-42.825,6.443
G16: P2.6 R3.1 R15.2 S9.1 S10.1 S11.1 S12.1 | length 159.5
  Top Layer w0.406: P2.6@-44.73,5.77 -44.885,5.615 -45.685,5.615 -46.8,4.5 -48.175,4.5 -49.225,3.45 -49.225,-3.925 -42.525,-10.625 -42.525,-12.575 -40.7,-14.4 v1(-30,-14.4) v1(-6,-14.4) v1(18,-14.4) v1(42,-14.4)
  Bottom Layer w0.406: S9.1@-30,-18.25 v1(-30,-14.4) S9.1@-30,-5.75 ; S10.1@-6,-18.25 S10.1@-6,-5.75 ; S11.1@18,-18.25 S11.1@18,-5.75 ; S12.1@42,-18.25 S12.1@42,-5.75
G17: P1.8 R8.1 | length 1.8
  Bottom Layer w0.406: P1.8@-44.73,-19.77 R8.1@-42.925,-19.77
G18: D1_LB4.1 D1_LB8.1 D1_LB12.1 D1_LB16.1 D2_LB4.1 D2_LB8.1 D2_LB12.1 D2_LB16.1 D3_LB4.1 D3_LB8.1 D3_LB12.1 D3_LB16.1 D4_LB4.1 D4_LB8.1 D4_LB12.1 D4_LB16.1 P1.7 | length 253.3
  Top Layer w0.203: v1(38.7,-19.2) 38.7,-19.95 D3_LB12.1@38.75,-20
  Top Layer w0.254: D4_LB16.1@31.5,-36.75 33.05,-36.75 33.6,-37.3 v1(38.7,-37.3) 44.9,-37.3 45.45,-36.75 D2_LB16.1@47.5,-36.75 ; D4_LB12.1@31.5,-12.75 33.05,-12.75 33.6,-13.3 v1(38.7,-13.3) 44.9,-13.3 45.45,-12.75 D2_LB12.1@47.5,-12.75 ; D4_LB8.1@31.5,11.25 33.05,11.25 33.6,10.7 v1(38.7,10.7) 44.9,10.7 45.45,11.25 D2_LB8.1@47.5,11.25 ; D4_LB4.1@31.5,35.25 33.05,35.25 33.6,34.7 v1(38.7,34.7) 44.9,34.7 45.45,35.25 D2_LB4.1@47.5,35.25
  Top Layer w0.406: P1.7@-47.27,-19.77 -46.015,-21.025 -43.575,-21.025 -39.55,-25.05 v1(40.25,-25.05) ; v1(38.7,-43.2) 38.7,-43.95 D3_LB16.1@38.75,-44 ; v1(38.7,4.8) 38.7,4.05 D3_LB8.1@38.75,4 ; v1(38.7,28.8) 38.7,28.05 D3_LB4.1@38.75,28 ; v1(40.25,-28.95) D1_LB16.1@40.25,-28 ; v1(40.25,-4.95) D1_LB12.1@40.25,-4 ; v1(40.25,19.05) D1_LB8.1@40.25,20 ; v1(40.25,43.05) D1_LB4.1@40.25,44
  Bottom Layer w0.406: v1(38.7,-43.2) v1(38.7,-37.3) 38.7,-34.7 40.25,-33.15 v1(40.25,-28.95) v1(40.25,-25.05) 38.7,-23.5 v1(38.7,-19.2) v1(38.7,-13.3) 38.7,-10.7 40.25,-9.15 v1(40.25,-4.95) 40.25,-1.05 38.725,0.475 v1@38.725,4.775 ; v1(38.7,4.8) v1(38.7,10.7) 38.7,13.3 40.25,14.85 v1(40.25,19.05) 40.25,22.95 38.725,24.475 v1@38.725,28.775 ; v1(38.7,28.8) v1(38.7,34.7) 38.7,37.3 40.25,38.85 v1(40.25,43.05)